# Altium PCB PCB1.PcbDoc
Units mil, origin at the board's own origin, x right, y up, seen from the top; angles counter-clockwise.
Board outline 2637.8 x 3852.11 mil, 4 copper layers (Top Layer, +3.3, +5, Bottom Layer), stack 30.634 mil thick; 56 components, 46 nets, 210 pads, 26 vias.
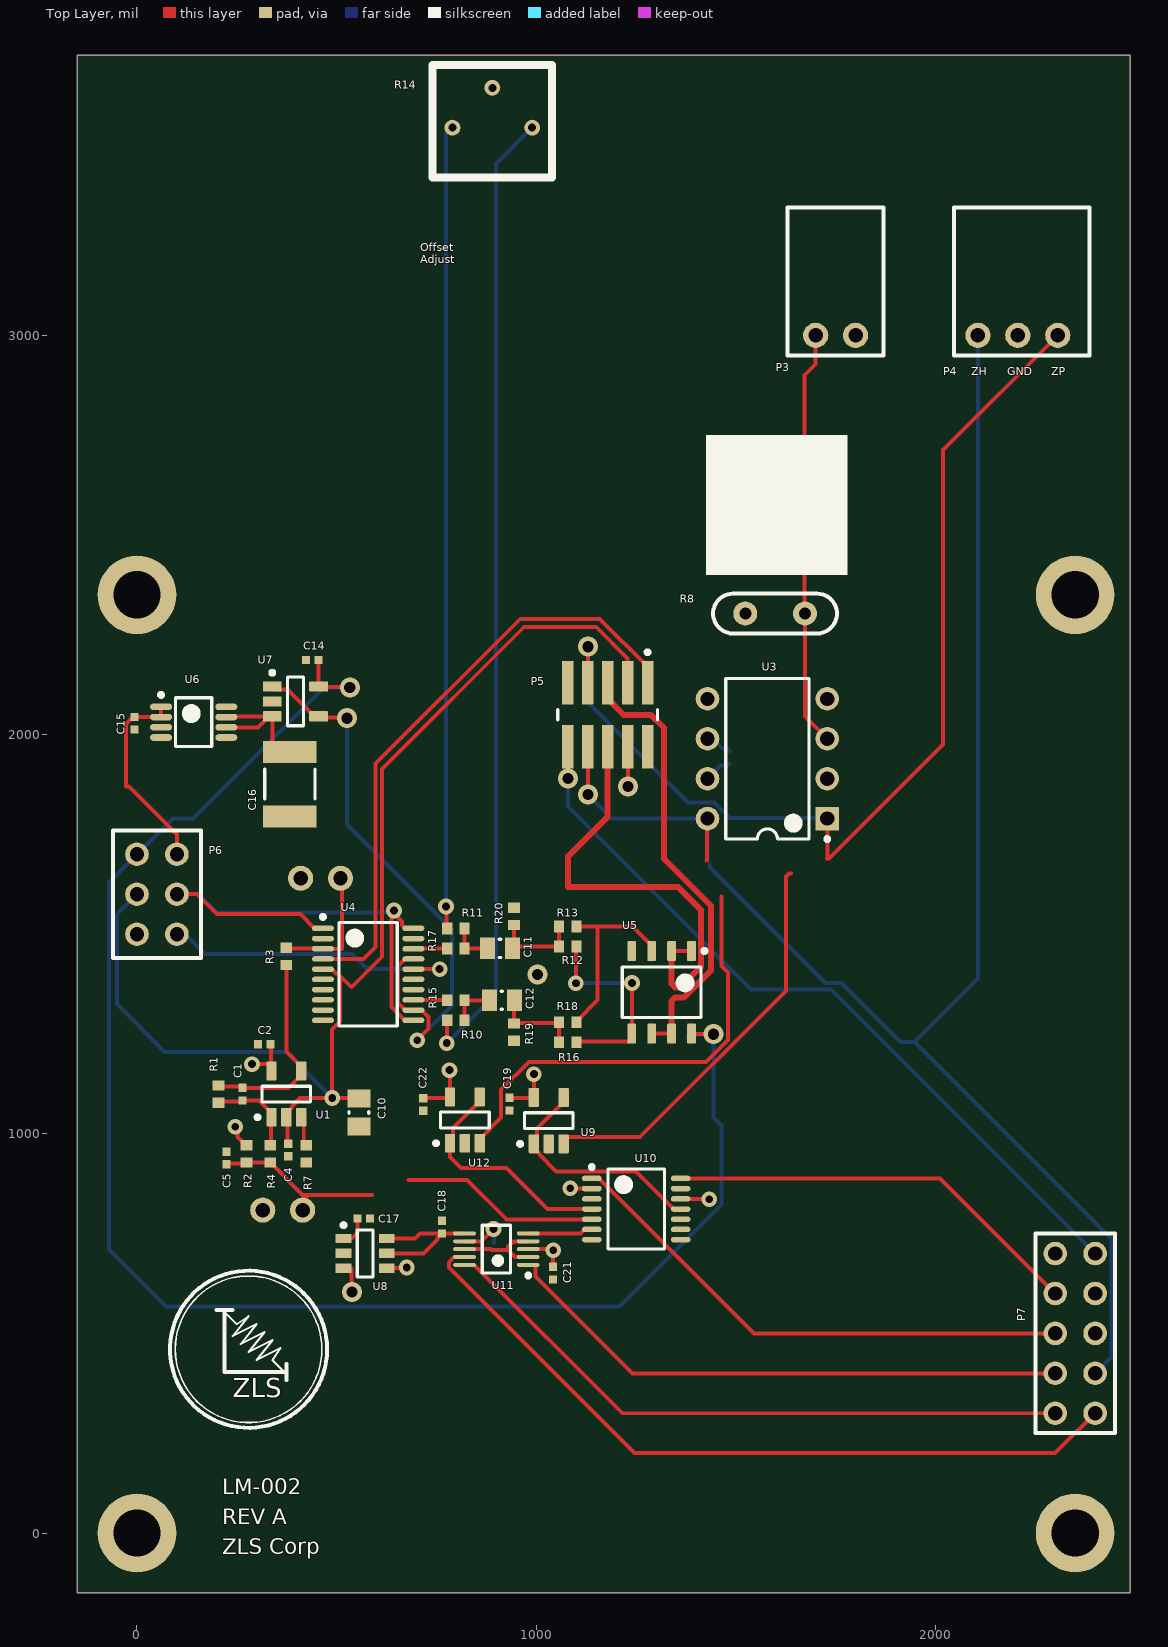
[diagram p0: Top Layer view]
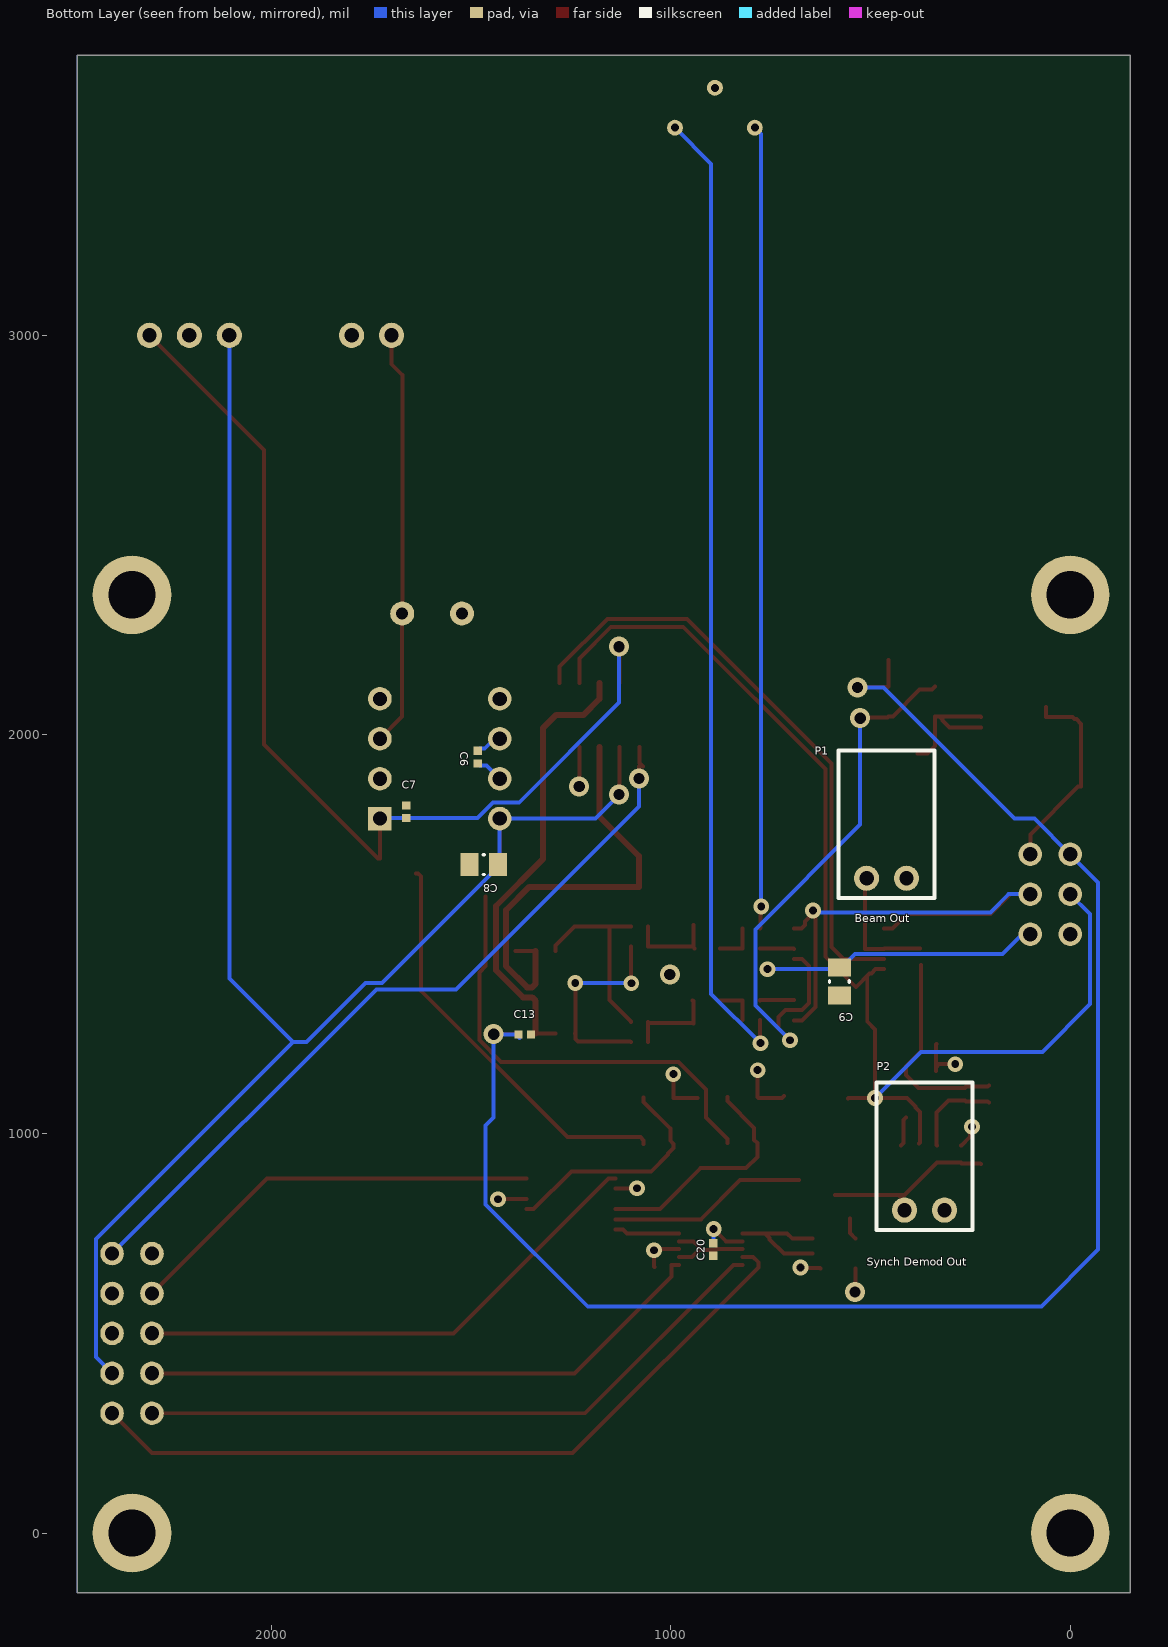
[diagram p1: Bottom Layer view, seen from below]
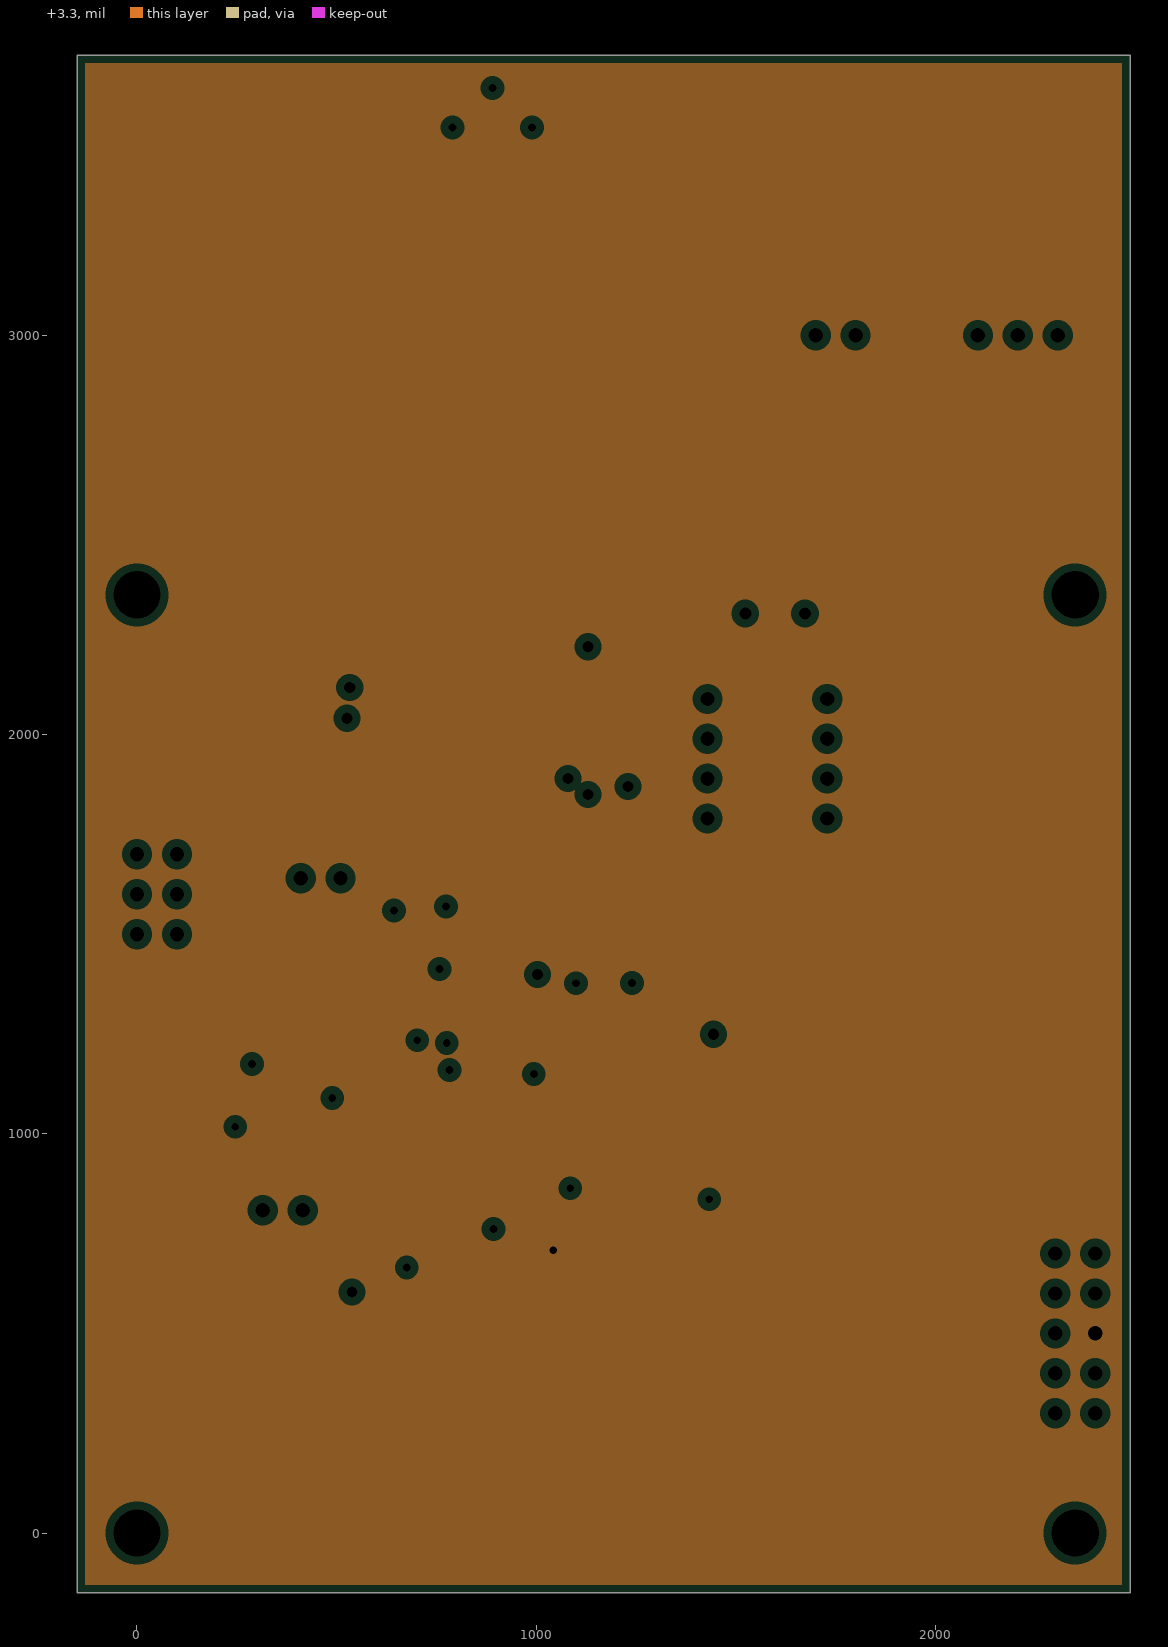
[diagram p2: +3.3, clearances drawn from the general rule]
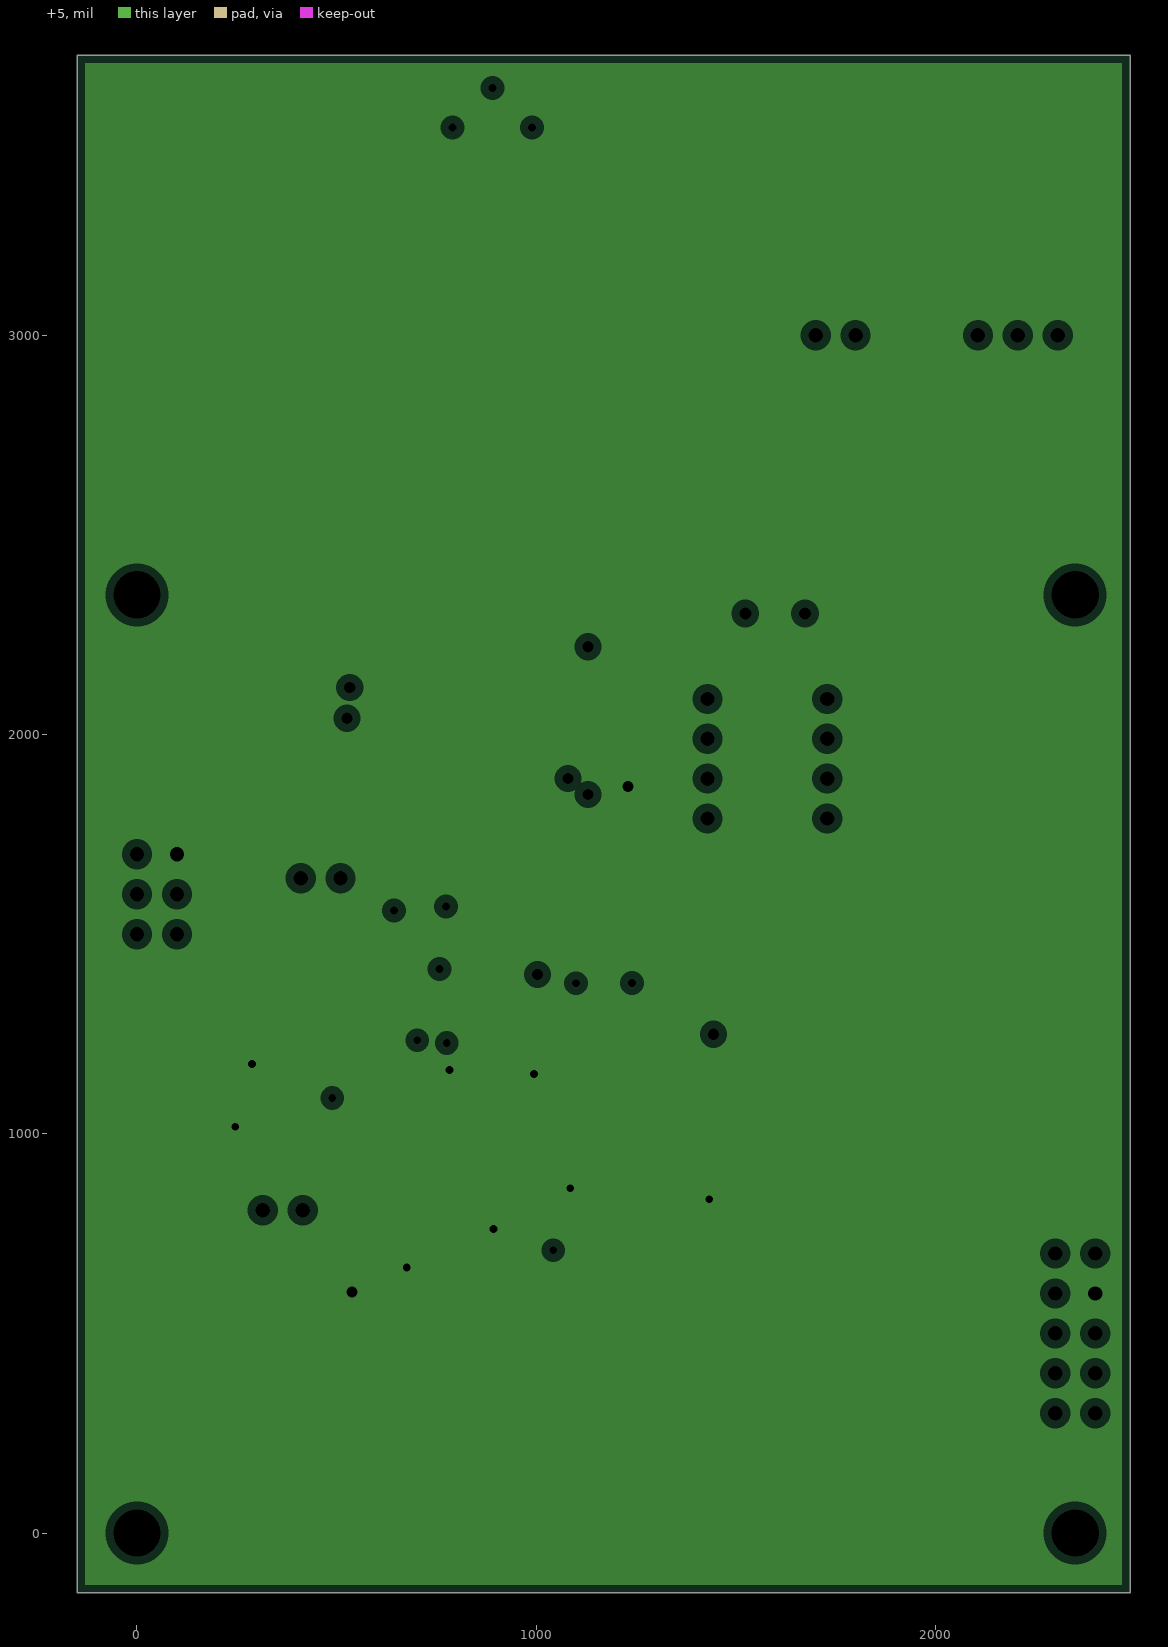
[diagram p3: +5, clearances drawn from the general rule]

## Layer stack, top to bottom
Top Solder: solder mask 0.4, Solder Resist, Dk 3.5
Top Layer: signal copper 1.4
Dielectric 1: core 10, FR-4, Dk 4.2
+3.3: plane copper 1.417, net +3.3
Dielectric 3: prepreg 5, Dk 4.2
+5: plane copper 1.417, net +5
Dielectric 2: core 10, Dk 4.2
Bottom Layer: signal copper 1.4
Bottom Solder: solder mask 0.4, Solder Resist, Dk 3.5

## Board outline
-150.11,-150.11 2487.69,-150.11 2487.68,3702 -150.11,3702

## Design rules (kind name [scope] priority, off if disabled: settings)
Clearance [All] p1: gap=5.91 ignorepadtopadclearanceinfootprint=TRUE except(1.57: SMDPad-SMDPad; 3.94: SMDPad-THPad)
DiffPairsRouting DiffPair_DiffPairsRouting [InDifferentialPair ('PLATE')] p1: maxlimit=10 minlimit=10 mostfreqgap=10 toplayer_minwidth=15 toplayer_maxwidth=15 toplayer_prefwidth=15 bottomlayer_minwidth=15 bottomlayer_maxwidth=15 bottomlayer_prefwidth=15 maxuncoupledlength=500
DiffPairsRouting [All] p2: maxlimit=10 minlimit=10 mostfreqgap=10 toplayer_minwidth=15 toplayer_maxwidth=15 toplayer_prefwidth=15 bottomlayer_minwidth=15 bottomlayer_maxwidth=15 bottomlayer_prefwidth=15 maxuncoupledlength=500
HoleSize [All] p1: absolutevalues=TRUE maxlimit=393.7 minlimit=2.99 maxpercent=80.000 minpercent=20.000
HoleToHoleClearance [All] p1: gap=4.72 allowstackedmicrovias=TRUE
MatchedLengths DiffPair_MatchedLengths [InDifferentialPair ('PLATE')] p1: tolerance=100 checknetsindiffpair=FALSE checkdiffpairvsdiffpair=TRUE checkxsignals=TRUE checkothers=TRUE
MinimumSolderMaskSliver [All] p1: minsoldermaskwidth=0.98
PlaneClearance [All] p1: clearance=20
PlaneConnect [All] p1: planeconnectstyle=Relief reliefexpansion=20 reliefentries=4 reliefconductorwidth=10 reliefairgap=10
PolygonConnect [All] p1: connectstyle=Relief reliefconductorwidth=10 reliefentries=4 polygonreliefangle="90 Angle" airgapwidth=10
RoutingVias [All] p1: holewidth=28 width=50 viastyle="Through Hole" minholewidth=5 minwidth=35.43 maxholewidth=55.12 maxwidth=100
SilkToSilkClearance [All] p1: silktosilkclearance=4.72
SilkToSolderMaskClearance [IsPad] p1: minsilkscreentomaskgap=4.72 clearancetoexposedcopper=TRUE
SolderMaskExpansion [All] p1: expansion=4
Width [All] p1: maxlimit=10 minlimit=3.94 preferedwidth=10
22 further rules are at their usual default settings.

## Classes and differential pairs
component class Sheet2: C18 C19 C20 C21 C22 R23 U7 U10 U11 U12
component class Sheet1: 19.685mil C1 C2 C5 C6 C7 C8 C9 C10 C11 C12 C13 C14 C15 C16 C17 P1 P2 P3 P4 P5 P6 P7 R1 R2 R3 R4 R10 R11 R13 R14 R15 R16 R17 R18 R19 R20 U1 U4 U5 U6 U8 U11
differential pair PLATE: +PLATE_P -PLATE_N

## Components (designator, comment, footprint, x,y, rotation, side; value= is the part's Value field where it differs from the comment)
C1 "" CAPC0402(1005)60_L 264.02,1099.46 r270 top
C2 "0.1uF" CAPC0402(1005)60_L 319.02,1224.46 r180 top
C4 "0.1uF" CAPC0402(1005)60_L 379.02,959.46 r270 top (schematic designator C3)
C5 "" CAPC0402(1005)60_L 224.02,939.46 r270 top (schematic designator C4)
C6 "0.1uF" CAPC0402(1005)60_L 1484.02,1943.46 r90 bottom (schematic designator C5)
C7 "0.1uF" CAPC0402(1005)60_L 1663.02,1806.46 r270 bottom (schematic designator C6)
C8 "Multilayer Ceramic Capacitors MLCC - SMD/SMT 0.01uF 50volts 10% X7R" CAPC0805(2012)145_N 1469.02,1674.46 r0 bottom (schematic designator C7)
C9 "CAP CER 0.1UF 25V X7R 0805" CAPC0805(2012)145_N 578.02,1381.46 r90 bottom (schematic designator C8)
C10 "CAP CER 0.1UF 25V X7R 0805" CAPC0805(2012)145_N 556.02,1053.46 r270 top (schematic designator C9)
C11 "CAP CER 1UF 25V X7R 0805" CAPC0805(2012)155_L 909.02,1464.46 r180 top (schematic designator C10)
C12 "CAP CER 1UF 25V X7R 0805" CAPC0805(2012)155_L 914.02,1334.46 r180 top (schematic designator C11)
C13 "0.1uF" CAPC0402(1005)60_L 1366.02,1248.46 r0 bottom (schematic designator C12)
C14 "0.1uF" CAPC0402(1005)60_L 439,2187 r0 top (schematic designator C13)
C15 "0.1uF" CAPC0402(1005)60_L -6,2028 r90 top (schematic designator C14)
C16 "CAP FILM 10UF 20% 16VDC 1812" CAPC1812(4532)250_N 383,1876 r90 top value=10uF (schematic designator C15)
C17 "0.1uF" CAPC0402(1005)60_L 567.84,787.69 r0 top (schematic designator C16)
C18 "0.1uF" CAPC0402(1005)60_L 764.26,766.23 r270 top (schematic designator C17)
C19 "0.1uF" CAPC0402(1005)60_L 933.02,1074.46 r90 top (schematic designator C18)
C20 "0.1uF" CAPC0402(1005)60_L 894.18,710.13 r270 bottom (schematic designator C19)
C21 "0.1uF" CAPC0402(1005)60_L 1041.82,651.07 r270 top (schematic designator C20)
C22 "0.1uF" CAPC0402(1005)60_L 717.02,1073.46 r90 top (schematic designator C21)
P1 "SSW-102-02-G-S-RA" SSW-102-02-G-S-RA 410,1640 r0 bottom
P2 "SSW-102-02-G-S-RA" SSW-102-02-G-S-RA 315,808.8 r0 bottom
P3 "SSW-102-02-G-S-RA" SSW-102-02-G-S-RA 1800,3000 r180 top
P4 "SSW-103-02-G-S-RA" SSW-103-02-G-S-RA 2106.3,3000 r0 top
P5 "FTSH-105-01-F-DV-K" SMTC-FTSH-105-01-L-DV-K_V 1179.02,2049.46 r180 top
P6 "MTLW-103-08-G-D-004" MTLW-103-08-G-D-004 50,1600 r270 top
P7 "TLW-105-05-G-D" TLW-105-05-G-D 2300,700 r270 top
R1 "300K" RESC0402(1005)_M 204.02,1099.46 r270 top
R2 "" RESC0402(1005)_M 274.02,949.46 r90 top
R3 "18K2 1% 0402(1005)" RESC0402(1005)_M 374.02,1444.46 r270 top
R4 "511k" RESC0402(1005)_M 334.02,949.46 r270 top
R7 "33K" RESC0402(1005)_M 424.02,949.46 r90 top (schematic designator R5)
R8 "TBD" VH102K 1673.23,2303.15 r180 top (schematic designator R6)
R10 "3.9k" RESC0402(1005)_M 799.02,1464.46 r180 top (schematic designator R7)
R11 "7.5k" RESC0402(1005)_M 799.02,1514.46 r0 top (schematic designator R8)
R12 "0" RESC0402(1005)_M 1079.02,1469.46 r180 top (schematic designator R9)
R13 "DNP" RESC0402(1005)_M 1079.02,1519.46 r180 top (schematic designator R10)
R14 "TRIMMER 5K OHM 0.25W PC PIN" "TRIMMER 2.54" 790,3520 r0 top (schematic designator R11)
R15 "7.5k" RESC0402(1005)_M 799.02,1284.46 r180 top (schematic designator R12)
R16 "DNP" RESC0402(1005)_M 1079.02,1229.46 r180 top (schematic designator R13)
R17 "3.9k" RESC0402(1005)_M 799.02,1334.46 r0 top (schematic designator R14)
R18 "0" RESC0402(1005)_M 1079.02,1279.46 r180 top (schematic designator R15)
R19 "1M" RESC0402(1005)_M 944.02,1254.46 r90 top (schematic designator R16)
R20 "1M" RESC0402(1005)_M 944.02,1544.46 r270 top (schematic designator R17)
U1 "OPA188AIDBVR" DBV0005A_M 374.02,1099.46 r90 top
U3 "AD584KNZ" ADI-N-8 1579.02,1939.46 r180 top (schematic designator U2)
U4 "MAX333CWP+" TSOP65P640X90-20N 579.02,1399.46 r0 top (schematic designator U3)
U5 "OPA2188AIDR" D0008A_L 1314.02,1354.46 r270 top (schematic designator U4)
U6 "LTC6655BHMS8-5#PBF" TSOP65P490X110-8N 142,2031 r0 top (schematic designator U5)
U7 "OPA188AIDBVR" DBV0005A_M 397,2083 r0 top (schematic designator U6)
U8 "MAX6070AAUT41+T" SOT95P280X445-6N 571.35,700.28 r0 top (schematic designator U7)
U9 "OPA188AIDBVR" DBV0005A_M 1031.43,1032.89 r90 top (schematic designator U8)
U10 "ADG1204YRUZ-REEL7" ADI-RU-14_L 1250.48,811.5 r0 top (schematic designator U9)
U11 "MAX11100EUB+T" U10+2_L 900.2,711.03 r180 top (schematic designator U10)
U12 "OPA188AIDBVR" DBV0005A_M 821.25,1034.46 r90 top (schematic designator U11)

## Footprints (in the part's own frame and the unit in brackets; to place one, negate y for a bottom-side part, rotate by r counter-clockwise, add the part's x,y. Pads: shape width x height; smd on the part's side, far side on the other; paste and mask are expansions set on the pad)
ADI-N-8 [mm] "DIP, 8-Leads, Body 9.59x6.6mm, Pitch 2.54mm"
  rect 1.5x1.5 hole 0.9: 1(-3.81,3.81)
  round 1.5 hole 0.9: 2(-3.81,1.27) 3(-3.81,-1.27) 4(-3.81,-3.81) 5(3.81,-3.81) 6(3.81,-1.27) 7(3.81,1.27) 8(3.81,3.81)
  silkscreen extent -3.94,-5.1 2.65,5.23, body extent -3.95,-5.07 3.95,5.07, height 5.33
ADI-RU-14_L [mm] "SOP, 14-Leads, Body 5x4.4mm, Pitch 0.65mm, IPC High Density"
  oval 1.25x0.35 smd: 1(-2.825,1.95) 2(-2.825,1.3) 3(-2.825,0.65) 4(-2.825,0) 5(-2.825,-0.65) 6(-2.825,-1.3) 7(-2.825,-1.95) 8(2.825,-1.95) 9(2.825,-1.3) 10(2.825,-0.65) 11(2.825,0) 12(2.825,0.65) 13(2.825,1.3) 14(2.825,1.95)
  silkscreen extent -2.95,-2.55 1.8,2.8, body extent -2.25,-2.55 2.25,2.55, height 1.2
CAPC0402(1005)60_L [mm] "Chip Capacitor, Body 1.0x0.5mm, Height 0.6mm, IPC High Density"
  rect 0.52x0.52 smd: 1(-0.4,0) 2(0.4,0)
  body extent -0.55,-0.3 0.55,0.3, height 0.6
CAPC0805(2012)145_N [mm] "Chip Capacitor, Body 2.0x1.2mm, Height 1.45mm, IPC Medium Density"
  rect 1.15x1.45 smd: 1(-0.9,0) 2(0.9,0)
  silkscreen extent -0.05,-0.62 0.05,0.63, body extent -1.1,-0.72 1.1,0.73, height 1.45
CAPC0805(2012)155_L [mm] "Chip Capacitor, Body 2.0x1.2mm, Height 1.55mm, IPC High Density"
  rect 0.95x1.35 smd: 1(-0.8,0) 2(0.8,0)
  silkscreen extent -0.05,-0.58 0.05,0.58, body extent -1.1,-0.72 1.1,0.72, height 1.55
CAPC1812(4532)250_N [mm] "Chip Capacitor, Body 4.5x3.2mm, Height 2.5mm, IPC Medium Density"
  rect 1.4x3.4 smd: 1(-2.05,0) 2(2.05,0)
  silkscreen extent -0.95,-1.6 0.95,1.6, body extent -2.4,-1.7 2.4,1.7, height 2.5
D0008A_L [mm] "SOIC, 8-Leads, Body 5x4mm, Pitch 1.27mm, IPC High Density"
  rrect18% 1.25x0.55 smd: 1(-2.625,1.905) 2(-2.625,0.635) 3(-2.625,-0.635) 4(-2.625,-1.905) 5(2.625,-1.905) 6(2.625,-0.635) 7(2.625,0.635) 8(2.625,1.905)
  silkscreen extent -2.75,-2.5 1.6,2.86, body extent -3,-2.45 3,2.45, height 1.63
DBV0005A_M [mm] "SOT23, 5-Leads, Body 3.05x1.75mm, Pitch 0.95mm, IPC Low Density"
  rrect15% 1.2x0.65 smd: 1(-1.475,0.95) 2(-1.475,0) 3(-1.475,-0.95) 4(1.475,-0.95) 5(1.475,0.95)
  silkscreen extent -1.6,-1.55 0.5,1.95, body extent -1.42,-1.46 1.42,1.46, height 1.08
MTLW-103-08-G-D-004 [mm]
  round 1.5 hole 0.91: 1(-2.54,-1.27) 2(-2.54,1.27) 3(0,-1.27) 4(0,1.27) 5(2.54,-1.27) 6(2.54,1.27)
  silkscreen extent -4.06,-2.79 4.06,2.79, body extent -3.81,-2.51 3.81,2.51, height 12.2
RESC0402(1005)_M [mm] "Chip Resistor, Body 1.0x0.5mm, IPC Low Density"
  rect 0.65x0.75 smd: 1(-0.55,0) 2(0.55,0)
  body extent -0.52,-0.28 0.53,0.28, height 0.4
SMTC-FTSH-105-01-L-DV-K_V [mm] "CONN, 10-Leads, Body 6.35x3.43mm, Pitch 1.27mm"
  rect 0.74x2.79 smd: 1(-2.54,-2.035) 2(-2.54,2.035) 3(-1.27,-2.035) 4(-1.27,2.035) 5(0,-2.035) 6(0,2.035) 7(1.27,-2.035) 8(1.27,2.035) 9(2.54,-2.035) 10(2.54,2.035)
  silkscreen extent -3.17,-4.1 3.17,0.34, body extent -3.17,-2.92 3.18,2.92, height 6.12
SOT95P280X445-6N [mm] "SOT23, 6-Leads, Body 2.90x2.80mm, Pitch 0.95mm, IPC Medium Density"
  rect 1x0.6 smd: 1(-1.375,0.95) 2(-1.375,0) 3(-1.375,-0.95) 4(1.375,-0.95) 5(1.375,0) 6(1.375,0.95)
  silkscreen extent -1.5,-1.5 0.5,1.92, body extent -1.5,-1.5 1.5,1.5, height 4.45
SSW-102-02-G-S-RA [mm]
  round 1.6 hole 0.91: 1(0,0) 2(2.54,0)
  silkscreen extent -1.78,-8.13 4.32,1.27, body extent -1.52,-8.06 4.06,0.44, height 3.21
SSW-103-02-G-S-RA [mm]
  round 1.6 hole 0.91: 1(0,0) 2(2.54,0) 3(5.08,0)
  silkscreen extent -1.52,-1.27 7.11,8.13, body extent -1.27,-0.44 6.86,8.06, height 1.73
TLW-105-05-G-D [mm]
  round 1.5 hole 0.91: 1(0,0) 2(0,2.54) 3(2.54,0) 4(2.54,2.54) 5(5.08,0) 6(5.08,2.54) 7(7.62,0) 8(7.62,2.54) 9(10.16,0) 10(10.16,2.54)
  silkscreen extent -1.27,-1.27 11.43,3.81, body extent -1.27,-1.31 11.43,3.72, height 6.35
"TRIMMER 2.54" [mil]
  round 40 hole 20: 1(0,0) 2(100,100) 3(200,0)
  silkscreen extent -50,-125 250,158, body extent -60,-126 260,200, height 175
TSOP65P490X110-8N [mm] "TSOP, 8-Leads, Body 3.00x3.00mm, Pitch 0.65mm, IPC Medium Density"
  oval 1.4x0.42 smd: 1(-2.075,0.975) 2(-2.075,0.325) 3(-2.075,-0.325) 4(-2.075,-0.975) 5(2.075,-0.975) 6(2.075,-0.325) 7(2.075,0.325) 8(2.075,0.975)
  silkscreen extent -2.2,-1.55 1.15,1.86, body extent -2.46,-1.55 2.46,1.55, height 1.1
TSOP65P640X90-20N [mm] "TSOP, 20-Leads, Body 6.50x4.40mm, Pitch 0.65mm, IPC Medium Density"
  oval 1.4x0.35 smd: 1(-2.875,2.925) 2(-2.875,2.275) 3(-2.875,1.625) 4(-2.875,0.975) 5(-2.875,0.325) 6(-2.875,-0.325) 7(-2.875,-0.975) 8(-2.875,-1.625) 9(-2.875,-2.275) 10(-2.875,-2.925) 11(2.875,-2.925) 12(2.875,-2.275) 13(2.875,-1.625) 14(2.875,-0.975) 15(2.875,-0.325) 16(2.875,0.325) 17(2.875,0.975) 18(2.875,1.625) 19(2.875,2.275) 20(2.875,2.925)
  silkscreen extent -3,-3.3 1.85,3.77, body extent -2.25,-3.3 2.25,3.3, height 0.9
U10+2_L [mm] "TSSOP, 10-Leads, Body 3x3mm, Pitch 0.5mm, IPC High Density"
  oval 1.45x0.25 smd: 1(-2.025,1) 2(-2.025,0.5) 3(-2.025,0) 4(-2.025,-0.5) 5(-2.025,-1) 6(2.025,-1) 7(2.025,-0.5) 8(2.025,0) 9(2.025,0.5) 10(2.025,1)
  silkscreen extent -2.15,-1.52 0.9,1.8, body extent -1.55,-1.55 1.55,1.55, height 1.1
VH102K [mil] "Hermetically Sealed High Precision Resistor"
  round 60 hole 30: 1(0,0) 2(149.61,0)
  silkscreen extent -80,-50 230,50

## Part data
C1: library part CMP-1034-01343-1, Capacitance=470nF, Case/Package=0402, Case Code (Metric)=1005, Dielectric=X5R, Dielectric Material=Ceramic, Manufacturer=TDK, Manufacturer Part Number=C1005X5R1E474M050BB, Max Operating Temperature=85°C, Min Operating Temperature=-55°C, Package Quantity=10000, Supplier Part Number 1=810-C1005X5R1E474M, Tolerance=20%, Voltage Rating=25V, Case Code (Imperial)=0402, ComponentLink1Description=https://datasheet.ciiva.com/26870/getdatasheetpartid-753870-26870164.pdf, ComponentLink1URL=https://datasheet.ciiva.com/26870/getdatasheetpartid-753870-26870164.pdf, ComponentLink2Description=https://datasheet.ciiva.com/24219/mlcc-commercial-general-en-24219290.pdf, ComponentLink2URL=https://datasheet.ciiva.com/24219/mlcc-commercial-general-en-24219290.pdf, Composition=Ceramic, Depth=0.5mm, Height=0.5mm, Lead Free="Lead Free", Length=1mm, Mount="Surface Mount", Packaging="Tape and Reel", Pricing 1="1=0.15, 10=0.101, 50=0.101, 100=0.04, 1000=0.028, 10000=0.023 (USD)", Radiation Hardening=No, REACH SVHC="No SVHC", Stock 1=40105, Supplier 1=Mouser, Termination=SMD/SMT, Thickness=500um, Voltage Rating (DC)=25V, Weight=2.3E-05oz, Width=0.02inch
C2 C4 C6 C7 C13 C14 C15 C17 C18 C19 C20 C21 C22: library part CMP-1034-00252-1, "CAP CER 0.1UF 10V X7R 0402", Manufacturer="Murata Electronics North America", Manufacturer Part Number=GRM155R71A104KA01D, Operating Temperature="-55°C ~ 125°C", Package / Case="0402 (1005 Metric)", Ratings=-, Supplier Part Number 1=490-6321-1-ND, Temperature Coefficient=X7R, Tolerance=±10%, Voltage - Rated=10V, Applications="General Purpose", Category=Capacitors, ComponentLink1Description=http://www.murata.com/~/media/webrenewal/support/library/catalog/products/capacitor/mlcc/c02e.ashx?la=en-us, ComponentLink1URL=http://www.murata.com/~/media/webrenewal/support/library/catalog/products/capacitor/mlcc/c02e.ashx?la=en-us, Features=-, Height - Seated (Max)=-, Lead Spacing=-, Mounting Type="Surface Mount, MLCC", Packaging="Cut Tape (CT)", Part Status=Active, Pricing 1="1=0.1, 10=0.014, 100=0.0063, 500=0.00446, 1000=0.00351, 2500=0.00319, 5000=0.00293 (USD)", RoHS="RoHS Compliant", Size / Dimension="0.039\" L x 0.020\" W (1.00mm x 0.50mm)", Stock 1=2920395, Supplier 1=Digi-Key, Thickness (Max)="0.022\" (0.55mm)"
C5: library part CMP-1034-01343-1, Capacitance=22, Capacitance Tolerance=5%, Ceramic Capacitor Case="0402 [1005 Metric]", Dielectric Characteristic="C0G / NP0", Manufacturer=AVX, Manufacturer Part Number=04025A220JAT2A, Supplier Part Number 1=96M1143, Voltage Rating=50, ComponentLink1Description=http://www.farnell.com/datasheets/2068140.pdf, ComponentLink1URL=http://www.farnell.com/datasheets/2068140.pdf, Packaging="Cut Tape", Pricing 1="1=0.003, 25=0.003, 100=0.003, 250=0.003, 500=0.003, 1000=0.003, 2500=0.003 (USD)", Product Range=-, RoHS=YES, Stock 1=239391, Supplier 1=Newark
C8: library part CMP-1036-04795-1, Capacitance=10nF, Case/Package=0805, Case Code (Metric)=2012, Dielectric=X7R, Dielectric Material=Ceramic, Manufacturer=Kemet, Manufacturer Part Number=C0805C103K5RACAUTO, Max Operating Temperature=125°C, Min Operating Temperature=-55°C, Package Quantity=1, Supplier Part Number 1=399-6924-1-ND, Tolerance=10%, Voltage Rating=50V, Case Code (Imperial)=0805, ComponentLink1Description=https://datasheet.ciiva.com/22700/1693454-22700519.pdf, ComponentLink1URL=https://datasheet.ciiva.com/22700/1693454-22700519.pdf, ComponentLink2Description=https://datasheet.ciiva.com/7842/1693454-7842175.pdf, ComponentLink2URL=https://datasheet.ciiva.com/7842/1693454-7842175.pdf, Contact Plating=Tin, Depth=1.25mm, Height=0.78mm, Length=2mm, Mount="Surface Mount", Packaging="Tape and Reel", Pricing 1="1=0.12, 10=0.087, 100=0.041, 500=0.0287, 1000=0.0238 (USD)", Radiation Hardening=No, REACH SVHC="No SVHC", Stock 1=63236, Supplier 1=Digi-Key, Termination=SMD/SMT, Thickness=0.035inch, Voltage Rating (DC)=50V, Width=0.049inch
C9 C10: library part CMP-1036-04795-1, Capacitance=0.1µF, Manufacturer="Murata Electronics North America", Manufacturer Part Number=GRM21BR71E104KA01L, Operating Temperature="-55°C ~ 125°C", Package / Case="0805 (2012 Metric)", Ratings=-, Supplier Part Number 1=490-1673-6-ND, Temperature Coefficient=X7R, Tolerance=±10%, Voltage - Rated=25V, Applications="General Purpose", Category=Capacitors, ComponentLink1Description=http://www.murata.com/~/media/webrenewal/support/library/catalog/products/capacitor/mlcc/c02e.ashx, ComponentLink1URL=http://www.murata.com/~/media/webrenewal/support/library/catalog/products/capacitor/mlcc/c02e.ashx, Features=-, Height - Seated (Max)=-, Lead Spacing=-, Lead Style=-, Mounting Type="Surface Mount, MLCC", Packaging=Digi-Reel®, Part Status=Active, Pricing 1="1=0.2, 10=0.145, 100=0.0683, 500=0.04788, 1000=0.03964 (USD)", RoHS="RoHS Compliant", Size / Dimension="0.079\" L x 0.049\" W (2.00mm x 1.25mm)", Stock 1=891652, Supplier 1=Digi-Key, Thickness (Max)="0.053\" (1.35mm)"
C11 C12: library part CMP-1036-04882-1, Capacitance=1µF, Manufacturer="Murata Electronics North America", Manufacturer Part Number=GRM21BR71E105KA99L, Operating Temperature="-55°C ~ 125°C", Package / Case="0805 (2012 Metric)", Ratings=-, Supplier Part Number 1=490-6484-6-ND, Temperature Coefficient=X7R, Tolerance=±10%, Voltage - Rated=25V, Applications="General Purpose", Category=Capacitors, ComponentLink1Description=http://www.murata.com/~/media/webrenewal/support/library/catalog/products/capacitor/mlcc/c02e.ashx, ComponentLink1URL=http://www.murata.com/~/media/webrenewal/support/library/catalog/products/capacitor/mlcc/c02e.ashx, Features=-, Height - Seated (Max)=-, Lead Spacing=-, Lead Style=-, Mounting Type="Surface Mount, MLCC", Packaging=Digi-Reel®, Part Status=Active, Pricing 1="1=0.14, 10=0.099, 100=0.0468, 500=0.0328, 1000=0.02715 (USD)", RoHS="RoHS Compliant", Size / Dimension="0.079\" L x 0.049\" W (2.00mm x 1.25mm)", Stock 1=295074, Supplier 1=Digi-Key, Thickness (Max)="0.053\" (1.35mm)"
C16: library part CMP-1040-01653-1, Case-EIA=1812, Case-Metric=4532, Dielectric Material="Acrylic, Metallized", Manufacturer=Rubycon, Manufacturer Part Number=16ST106MC44532, Operating Temperature="-55°C ~ 125°C", Package / Case="1812 (4532 Metric)", Rated Voltage="16 V", Supplier Part Number 1=1189-1792-1-ND, Tolerance=±10%, Voltage Rating - AC=-, Voltage Rating - DC=16V, Applications="DC Link, DC Filtering", Category=Capacitors, ComponentLink1Description=http://www.rubycon.co.jp/en/catalog/e_pdfs/pmlcap/e_ST.pdf, ComponentLink1URL=http://www.rubycon.co.jp/en/catalog/e_pdfs/pmlcap/e_ST.pdf, Features=-, Height - Seated (Max)="0.102\" (2.60mm)", Lead Spacing=-, Max Thickness="2.5 mm", Mounting Type="Surface Mount", Packaging="Cut Tape (CT)", Part Status=Active, Pricing 1="1=7.05, 10=6.263, 100=5.0105 (USD)", RoHS="RoHS Compliant", Size / Dimension="0.177\" L x 0.126\" W (4.50mm x 3.20mm)", Stock 1=1994, Supplier 1=Digi-Key, Technology=SMT
P1 P2 P3: Supplier Part Number 1=SAM1225-02-ND, Supplier 1=Digi-Key
P5: library part CMP-2000-05352-1, "Male Header, Pitch 1.27 mm, 2 x 5 Position, Height 6.12 mm, RoHS, Tube", Color=Black, Manufacturer=Samtec, Package Description="Male Header, Pitch 1.27 mm, 2 x 5 Position, Height 5.97 mm, Tail Length 4.32 mm", Package Reference=FTSH-105-01-L-DV-K, Category=Connectors,Interconnects, Connector Type=Header,Shrouded, Contact Finish=Gold, Contact Finish Thickness=3µin(0.08µm), Contact Type=MalePin, Datasheet URL=http://suddendocs.samtec.com/prints/ftsh-1xx-xx-xxx-dv-xxx-mkt.pdf, Datasheet Version="Rev. ET, 10/1995", Family=RectangularConnectors-Headers,MalePins, Fastening Type=-, Features=-, Manufacturer URL=http://www.samtec.com/, Mounting Type=SurfaceMount, Number of Positions=10, Number of Positions Loaded=All, Number of Rows=2, Package URL=http://suddendocs.samtec.com/prints/ftsh-1xx-xx-xxx-dv-xxx-footprint.pdf, Packaging=Tube, Series=FTSH, Termination=Solder
P6: library part "Header 3X2", "Header, 3-Pin, Dual row"
P7: Current Rating="5.2A per Contact", Insulation Color=Black, Manufacturer="Samtec Inc.", Manufacturer Part Number=MTLW-105-05-G-D-170, Material Flammability Rating="UL94 V-0", Operating Temperature="-55°C ~ 125°C", Supplier Part Number 1=MTLW-105-05-G-D-170-ND, Voltage Rating=-, Applications=-, Category="Connectors, Interconnects", ComponentLink1Description=http://suddendocs.samtec.com/prints/mtlw-1xx-xx-xx-x-xxx-xx-xx-mkt1.pdf, ComponentLink1URL=http://suddendocs.samtec.com/prints/mtlw-1xx-xx-xx-x-xxx-xx-xx-mkt1.pdf, Connector Type=Header, Contact Finish - Mating=Gold, Contact Finish - Post=Gold, Contact Finish Thickness - Mating="10µin (0.25µm)", Contact Finish Thickness - Post="3µin (0.08µm)", Contact Length - Mating="0.170\" (4.32mm)", Contact Length - Post="0.105\" (2.67mm)", Contact Material="Phosphor Bronze", Contact Shape=Square, Contact Type="Male Pin", Fastening Type=Push-Pull, Features=-, Ingress Protection=-, Insulation Height="0.060\" (1.52mm)", Insulation Material="Liquid Crystal Polymer (LCP)", Mated Stacking Heights=-, Mounting Type="Through Hole", Number of Positions=10, Number of Positions Loaded=All, Number of Rows=2, Overall Contact Length="0.335\" (8.51mm)", Packaging=Tube, Part Status=Active, Pitch - Mating="0.100\" (2.54mm)", Pricing 1="1=1.79 (USD)", RoHS="RoHS Compliant", Row Spacing - Mating="0.100\" (2.54mm)", Shrouding=Unshrouded, Stock 1=0, Style="Board to Board or Cable", Supplier 1=Digi-Key, Termination=Solder
R1 R4 R7 R12 R13 R16 R18: library part CMP-1011-00651-1
R2: library part CMP-1011-00651-1, "RES SMD 100K OHM 1% 1/8W 0402", Manufacturer=VISHAY, Manufacturer Part Number=CRCW0402100KFKEDHP, Supplier Part Number 1=24T2824, ComponentLink1Description=http://www.farnell.com/datasheets/2140397.pdf, ComponentLink1URL=http://www.farnell.com/datasheets/2140397.pdf, Pricing 1="10000=0.014, 20000=0.012 (USD)", Stock 1=0, Supplier 1=Newark
R3: library part CMP-1011-00651-1, "18K2 0.063W 1% 0402 (1005 Metric)  SMD", Manufacturer=VISHAY, Manufacturer Part Number=CRCW040218K2FKED, Power Rating=63, Resistance=18.2, Resistance Tolerance=1%, Resistor Case Style="0402 [1005 Metric]", Supplier Part Number 1=52K6758, Voltage Rating=50, ComponentLink1Description=http://www.vishay.com/docs/31543/packsmre.pdf, ComponentLink1URL=http://www.vishay.com/docs/31543/packsmre.pdf, ComponentLink2Description=http://www.farnell.com/cad/1551401.zip, ComponentLink2URL=http://www.farnell.com/cad/1551401.zip, ComponentLink3Description=http://www.farnell.com/datasheets/2111203.pdf?_ga=1.39057253.733356815.1493180800, ComponentLink3URL=http://www.farnell.com/datasheets/2111203.pdf?_ga=1.39057253.733356815.1493180800, No. of Pins=2, Packaging="Cut Tape", Pricing 1="1=0.004, 25=0.004, 100=0.004, 250=0.004, 500=0.004, 1000=0.004 (USD)", Product Range="CRCW Series", RoHS=YESX, Stock 1=9263, Supplier 1=Newark
R8: library part CMP-1013-00393-1
R10 R11 R15 R17 R19 R20: library part CMP-1011-00463-1
R14: library part Trimmer, Manufacturer="Vishay Foil Resistors (Division of Vishay Precision Group)", Manufacturer Part Number=Y00535K00000J0L, Power (Watts)="0.25W, 1/4W", Resistance (Ohms)=5k, Resistive Material="Metal Foil", Supplier Part Number 1=804-1020-ND, Temperature Coefficient=±10ppm/°C, Tolerance=±5%, Adjustment Type="Side Adjustment", Category="Potentiometers, Variable Resistors", ComponentLink1Description=http://www.vishaypg.com/docs/63053/1240.pdf, ComponentLink1URL=http://www.vishaypg.com/docs/63053/1240.pdf, Mounting Type="Through Hole", Number of Turns=21, Packaging=Bulk, Part Status=Active, Pricing 1="1=34.42, 10=32.265, 25=26.5292, 50=22.944, 100=22.227, 250=20.793, 500=19.2156 (USD)", RoHS="RoHS Compliant", Size / Dimension="Rectangular - 0.250\" x 0.175\" Face x 0.250\" L (6.35mm x 4.45mm x 6.35mm)", Stock 1=679, Supplier 1=Digi-Key, Termination Style="PC Pins"
U1 U7 U9 U12: library part CMP-0809-00005-2, "Precision, Low Noise, Rail-to-Rail Output, Zero-Drift Operational Amplifier, 4 to 36 V, -40 to 125 degC, 5-pin SOT23 (DBV5), Green (RoHS & no Sb/Br)", Manufacturer="Texas Instruments", Rating=Catalog, Total Supply Voltage(Max)(+5V is 5, +/-5V is 10)=36, Total Supply Voltage(Min)(+5V is 5, +/-5V is 10)=4, CMRR(Min)(dB)=120, Code_JEDEC=MO-178, ComponentLink1Description="Manufacturer URL", ComponentLink1URL=http://www.ti.com/, ComponentLink2Description=Datasheet, ComponentLink2URL=http://www.ti.com/lit/ds/symlink/opa188.pdf, ComponentLink3Description="Package Specification", ComponentLink3URL=http://www.ti.com/litv/pdf/mpds018i, DatasheetVersion=SBOS642A, Eco-Plan="Green (RoHS & no Sb/Br)", GBW(Typ)(MHz)=2, Iq per channel(Max)(mA)=0.51, Mounting Technology="Surface Mount", Number of Channels=1, Offset Drift(Typ)(uV/C)=0.03, PackageDescription="5-Pin Plastic Small Outline, Body 1.6 x 2.9 mm, Pitch 0.95 mm", PackageReference=DBV0005A, PackageVersion="4073253-4/K, 03/2006", PartNumber=OPA188AIDBVR, Slew Rate(Typ)(V/us)=0.8, SubFamily="Zero Drift Precision Amplifier"
U3: library part CMP-0784-00054-1, "Pin Programmable, Precision Voltage Reference, + 2.5 / + 5 / + 7.5 / + 10 Prog V Output, 4.5 to 30 V Supply, Commercial, 8-pin DIP (N-8), Tube", Manufacturer="Analog Devices", Operating Temp Range="0 to 70 degC", Code_JEDEC=MS-001, ComponentLink1Description="Manufacturer URL", ComponentLink1URL=http://www.analog.com/en/index.html, ComponentLink2Description=Datasheet, ComponentLink2URL=http://www.analog.com/static/imported-files/data_sheets/AD584.pdf, ComponentLink3Description="Package Specification", ComponentLink3URL=http:/www.analog.com/static/imported-files/packages/PKG_PDF/PDIP(N)/N_8.pdf, ComponentLink4Description="URL Link1", ComponentLink4URL="Product URL:http://www.analog.com/en/special-linear-functions/voltage-references/ad584/products/product.html", DatasheetVersion="Rev. C", Max V Supply (V)=30, Min V Supply (V)=4.5, Mounting Technology="Through Hole", PackageDescription="8-Pin Plastic Dual In-Line Package, Row spacing 7.62 mm, Pitch 2.54 mm", PackageReference=N-8, PackageVersion="070606-A, 07/2006", Packing=Tube, PartNumber=AD584KNZ, Ref Out TC (ppm/C)=15, Vout="2.5V, 5V, 7.5V, 10V"
U4: "IC SWITCH QUAD SPDT 20TSSOP", Case/Package=TSSOP, Dual Supply Voltage=15V, Manufacturer=Maxim, Manufacturer Part Number=MAX333AEUP+, Max Dual Supply Voltage=20V, Max Operating Temperature=85°C, Max Power Dissipation=559mW, Max Supply Current=250uA, Max Supply Voltage=30V, Min Dual Supply Voltage=4.5V, Min Operating Temperature=-40°C, Min Supply Voltage=10V, On-State Resistance=35R, Operating Supply Current=1uA, Package Quantity=74, Supplier Part Number 1=700-MAX333AEUP, ComponentLink1Description=https://datasheet.ciiva.com/2978/max333a-2978850.pdf, ComponentLink1URL=https://datasheet.ciiva.com/2978/max333a-2978850.pdf, ComponentLink2Description=https://datasheet.ciiva.com/30478/0900766b81253c85-30478260.pdf, ComponentLink2URL=https://datasheet.ciiva.com/30478/0900766b81253c85-30478260.pdf, ComponentLink3Description=https://datasheet.ciiva.com/1674/max333a-1674617.pdf, ComponentLink3URL=https://datasheet.ciiva.com/1674/max333a-1674617.pdf, ComponentLink4Description=https://datasheet.ciiva.com/26825/max333aeup-26825546.pdf, ComponentLink4URL=https://datasheet.ciiva.com/26825/max333aeup-26825546.pdf, Height=0.95mm, Lead Free="Lead Free", Length=6.6mm, Number of Bits=4, Number of Channels=4, Number of Pins=20, Packaging=Rail/Tube, Pricing 1="1=6.77, 10=6.43, 50=5.8, 100=5.8, 1000=5.62, 10000=5.62 (USD)", Radiation Hardening=No, REACH SVHC=Unknown, Stock 1=664, Supplier 1=Mouser, Supply Type=Single,Dual, Throw Configuration=SPDT, Turn-Off Delay Time=145ns, Turn-On Delay Time=175ns, Weight=0.006737oz, Width=4.5mm
U5: library part CMP-0272-00241-3, "0.03 uV/degC, 6 uV Vos, Low Noise, Rail-to-Rail Output, Zero-Drift Operational Amplifier, 4 to 36 V, -40 to 105 degC, 8-pin SOIC (D8), Green (RoHS & no Sb/Br)", Current - Output / Channel=18mA, Current - Supply=415µA, Manufacturer="Texas Instruments", Operating Temperature="-40°C ~ 105°C", Package / Case="8-SOIC (0.154\", 3.90mm Width)", Supplier Device Package=8-SOIC, Supplier Part Number 1=296-29454-6-ND, Voltage - Supply, Single/Dual (±)="4 V ~ 36 V, ±2 V ~ 18 V", -3db Bandwidth=-, Amplifier Type=Zero-Drift, Category="Integrated Circuits (ICs)", ComponentLink1Description=http://www.ti.com/lit/ds/symlink/opa2188.pdf, ComponentLink1URL=http://www.ti.com/lit/ds/symlink/opa2188.pdf, Manufacturer Part Number=OPA2188AIDR, Mounting Type="Surface Mount", Number of Circuits=2, Output Type=Rail-to-Rail, Packaging=Digi-Reel®, Part Status=Active, Pricing 1="1=3.44, 10=3.089, 100=2.5307, 500=2.15434, 1000=1.81692 (USD)", RoHS="RoHS Compliant", Slew Rate="0.8 V/µs", Stock 1=8272, Supplier 1=Digi-Key
U6: Current - Supply=7.5mA, Manufacturer="Linear Technology", Operating Temperature="-40°C ~ 125°C (TA)", Package / Case="8-TSSOP, 8-MSOP (0.118\", 3.00mm Width)", Supplier Device Package=8-MSOP, Supplier Part Number 1=LTC6655BHMS8-5#PBF-ND, Temperature Coefficient=2ppm/°C, Tolerance=±0.025%, Voltage - Input="5.5 V ~ 13.2 V", Voltage - Output (Min/Fixed)=5V, Category="Integrated Circuits (ICs)", ComponentLink1Description=http://www.linear.com/docs/28576, ComponentLink1URL=http://www.linear.com/docs/28576, Manufacturer Part Number=LTC6655BHMS8-5#PBF, Mounting Type="Surface Mount", Noise - 0.1Hz to 10Hz=0.25ppmp-p, Noise - 10Hz to 10kHz=-, Output Type=Fixed, Packaging=Tube, Part Status=Active, Pricing 1="1=12.29, 25=8.158, 100=6.7 (USD)", Reference Type=Series, RoHS="RoHS Compliant", Stock 1=872, Supplier 1=Digi-Key
U8: "IC VREF SERIES 4.096V SOT23", Current - Supply=350µA, Manufacturer="Maxim Integrated", Operating Temperature="-40°C ~ 125°C (TA)", Package / Case=SOT-23-6, Supplier Part Number 1=MAX6070AAUT41+TCT-ND, Temperature Coefficient=6ppm/°C, Tolerance=±0.04%, Voltage - Input="4.3 V ~ 5.5 V", Voltage - Output (Min/Fixed)=4.096V, Category="Integrated Circuits (ICs)", ComponentLink1Description=https://datasheets.maximintegrated.com/en/ds/MAX6070-MAX6071.pdf, ComponentLink1URL=https://datasheets.maximintegrated.com/en/ds/MAX6070-MAX6071.pdf, Manufacturer Part Number=MAX6070AAUT41+T, Mounting Type="Surface Mount", Noise - 0.1Hz to 10Hz=9.6µVp-p, Noise - 10Hz to 10kHz=9µVrms, Output Type=Fixed, Packaging="Cut Tape (CT)", Part Status=Active, Pricing 1="1=3.41, 10=3.213, 25=2.5704, 50=2.4418, 100=2.2491, 250=2.13344, 500=2.05634 (USD)", Reference Type=Series, RoHS="RoHS Compliant", Stock 1=2623, Supplier 1=Digi-Key, Supplier Device Package=SOT-23-6
U10: library part CMP-0793-00109-1, "Low Capacitance, Low Charge Injection, +/-15 V / +12 V, 4:1 iCMOS Multiplexer, 120 Ohm Ron, 14-pin SOP (RU-14), Reel", Manufacturer="Analog Devices", Bandwidth (Hz)="800M, 550M", Code_JEDEC=MO-153AB-1, ComponentLink1Description="Manufacturer URL", ComponentLink1URL=http://www.analog.com/en/index.html, ComponentLink2Description=Datasheet, ComponentLink2URL=http://www.analog.com/static/imported-files/data_sheets/ADG1204.pdf, ComponentLink3Description="Package Specification", ComponentLink3URL=http://www.analog.com/static/imported-files/packages/36057385283879153717235186773RU14.pdf, DatasheetVersion="Rev. B", Max Analog Signal Range="Vss to Vdd", Mounting Technology="Surface Mount", PackageDescription="14-Pin Thin Shrink Small Outline Package, Body 5 x 4.4 mm, Pitch 0.65 mm", PackageReference=RU-14, PackageVersion=Aug-02, Packing=Reel, PartNumber=ADG1204YRUZ-REEL7, Ron (ohms)=120, t transition (s)=120n
U11: library part CMP-0249-00017-1, "16-Bit, +5V, 200ksps ADC with 10uA Shutdown, 10-Pin uMAX, -40°C to +85°C, Pb-Free, Tape and Reel", Code_JEDEC=MO-187-BA, ComponentLink1Description="Manufacturer URL", ComponentLink1URL=http://www.maxim-ic.com, ComponentLink2Description=Datasheet, ComponentLink2URL=http://datasheets.maxim-ic.com/en/ds/MAX11100.pdf, ComponentLink3Description="Package Specification", ComponentLink3URL=http://pdfserv.maxim-ic.com/package_dwgs/21-0061.PDF, DatasheetVersion="Rev 1, Jan-2012", PackageDescription="10-Pin Micro-MAX Thin Shrink Small Outline (uSOP), 3 x 3 x 0.85 mm Body, 0.5 mm Pitch, Pb-Free", PackageReference=U10+2, PackageVersion="revL, 2008"

## Free pads (board coordinates)
  round 196.85 hole 118.11: ""(0,0) ""(0,2350) ""(2350,0) ""(2350,2350)

## Via types
v1: diameter 39.37, hole 19.68, Top Layer to Bottom Layer, 17 vias
v2: diameter 50, hole 28, Top Layer to Bottom Layer, 9 vias

## Nets (pads, with @x,y where several pads share a name; then routed paths per layer and width w, separated by ;. In a path a pad name is that pad's centre, name@x,y a point inside that pad or via, vN(x,y) a via of type N, cw(c..) or ccw(c..) an arc to the next point about the centre after c; other vN are vias at no path point)
+3.3: C21.1 P7.6 U11.3 | length 105.8
  Top Layer w10: U11.3 980.01,710.95 1040.01,710.95 v1(1042.8,708.16) 1042.31,707.67 1042.31,667.31 C21.1
+5: C2.1 C15.2 C19.2 C20.1 C22.2 P5.4 P6.2 P7.4 R2.2 U1.5 U6.1 U6.2 U8.3 U8.4 U9.5 U10.2 U10.12 U11.7 U12.5 | length 1397.9
  Top Layer w10: U6.1 U6.2 C15.2 -11.24,2038.51 -15.64,2038.51 -27.14,2027.01 -27.14,1870 -20,1870 100,1750 P6.2 ; v1(246.02,1017.46) 251.64,1011.84 251.64,991.52 272.06,971.11 R2.2 ; v1(288.02,1174.46) 288.14,1174.34 328.83,1174.34 336.62,1166.55 U1.5 ; C2.1 335.7,1223.53 U1.5@335.7,1166.55 ; 537.71,662.29 537.71,604.83 v2(538.84,603.69) ; U8.4 626.59,663.99 674.57,663.99 v1(675.68,665.11) ; C22.2@717.02,1095.2 717.02,1094.44 722.26,1089.2 780.53,1089.2 U12.5 783.44,1092.94 783.44,1159.04 v1(783.02,1159.46) ; U11.7 820.56,730.8 862.69,730.8 892.21,760.32 v1@894.18,760.32 ; C19.2 993.27,1090.2 U9.5 v1(994.02,1149.46) ; v1@1086.11,862.69 1086.6,863.18 1138.77,863.18 U10.2 ; P5.4 1229.51,1968.85 1229.51,1870.49 v2(1230,1870) ; U10.12 1362.19,836.6 1433.06,836.6 v1(1433.55,836.11)
  Bottom Layer w10: v1(893.2,761.31) 893.69,760.82 893.69,726.37 C20.1
  other v1: 1085.13,863.67
+5R: U4.12 U4.17 U7.1 U7.4 | length 1470.5
  Top Layer w10: U7.1 346.72,2112.61 377.24,2112.61 444.24,2045.6 U7.4 457.37,2043.3 523.7,2043.3 v2(526,2041) ; U4.17 671.54,1437.84 653.75,1420.05 653.75,1327.69 671.54,1309.89 712.88,1309.89 730.68,1292.09 730.68,1263.11 v1(702.02,1234.46)
  Bottom Layer w10: v2(526,2041) 526,1774.22 788.61,1511.6 788.61,1321.05 v1(702.02,1234.46)
+9: C9.2 P6.6 U4.16 | length 759.8
  Top Layer w10: U4.16 692.31,1412.35 757.92,1412.35 v1(758.02,1412.46)
  Bottom Layer w10: P6.6 120,1500 170,1450 539.01,1450 572.12,1416.89 C9.2 ; C9.2@576.55,1412.46 v1(758.02,1412.46)
+12: C13.2 C14.2 P6.1 U5.8 U7.5 | length 4130.7
  Top Layer w10: C14.2 454.75,2120.72 456.27,2119.2 531.8,2119.2 v2(533,2118) ; U5.8 1390.68,1249.46 v2(1444.02,1249.46)
  Bottom Layer w10: v2(533,2118) 468,2118 140,1790 90,1790 P6.1 -70,1630 -70,710 72.21,567.79 1208.49,567.79 1464.14,823.44 1464.14,1020.98 1444.02,1041.1 v2(1444.02,1249.46) 1443.52,1248.96 1385.19,1248.96 1379.46,1243.22 C13.2@1379.46,1239.46
-5: C4.1 C10.1 P5.3 P6.3 U1.2 U4.5 | length 3048.3
  Top Layer w10: C4.1 376.52,977.7 376.52,1054.71 387.72,1065.91 387.72,1068.4 408.78,1089.46 v1(489.02,1089.46) ; U4.5 487.53,1412.25 498.19,1401.59 502.54,1401.59 537.06,1367.06 613.43,1443.43 613.43,1913.43 970,2270 1150,2270 1229.02,2190.98 P5.3 ; 508.39,1395.73 508.39,1281.02 489.02,1261.65 v1(489.02,1089.46) ; C10.1 555.46,1089.46 v1(489.02,1089.46)
  Bottom Layer w10: P6.3 -50,1550 -50,1324.58 69.3,1205.28 373.2,1205.28 v1(489.02,1089.46)
A0: P7.5 U10.1 | length 1323.1
  Top Layer w10: U10.1 1156.98,888.28 1545.25,500 P7.5 P7.5@2301.57,500
A1: P7.3 U10.14 | length 1032.3
  Top Layer w10: U10.14 2011.72,888.28 P7.3@2282,618
"ADC REF": C18.2 U8.5 U8.6 U11.6 | length 321.7
  Top Layer w10: 645.98,699.69 717.49,699.69 753.04,735.24 753.04,739.26 764.22,750.44 820.44,750.44 U11.6 ; 645.98,737.09 695.81,737.09 709.19,750.48 C18.2
Analog_Mux_Out: U10.6 U11.5 | length 163.4
  Top Layer w10: U11.5 1110.6,750.4 1120.52,760.32 U10.6
BEAM: P5.1 U4.4 | length 1525.7
  Top Layer w10: U4.4 567.84,1437.84 597.53,1467.53 597.53,1927.53 960,2290 1158.95,2290 1279.02,2169.93 P5.1
"Beam Sync Demod Out": C5.2 P2.2 R2.1 R4.2 | length 444.6
  Top Layer w10: C5.2 226.07,925.76 271.98,925.76 R2.1 R4.2 414.89,846.94 430,846.94 ; P2.2 415,831.94 430,846.94 ; 589.06,846.94 430,846.94
Beam_Out: P1.2 R3.1 U4.3 | length 316.2
  Top Layer w10: R3.1@375.68,1464.46 375.98,1464.16 465.11,1464.16 U4.3 513.43,1463.43 513.43,1636.57 P1.2
Beam_Reduced: U10.5 | length 500.4
  Top Layer w10: 679.61,884.34 826.66,884.34 925.09,785.91 U10.5
FB_CS0: P7.10 U11.9 | length 1936.5
  Top Layer w10: U11.9 820.4,691.27 794.08,691.27 781.03,678.22 781.03,665.11 1246.14,200 2300,200 P7.10@2418,318
GND: C2.2 C4.2 C5.1 C7.1 C8.2 C9.1 C10.2 C13.1 C14.1 C15.1 C16.1 C17.2 C18.1 C19.1 C20.2 C21.2 C22.1 P1.1 P2.1 P3.1 P4.2 P5.2 P5.9 P6.5 P7.1 R7.1 R8.2 R14.2 R19.1 R20.1 U3.4 U4.2 U4.6 U4.14 U4.19 U5.4 U6.3 U6.4 U6.5 U6.8 U7.2 U8.2 U9.2 U10.3 U10.13 U11.2 U11.4 U11.8 U12.2 | length 231.7
  Top Layer w10: U11.8 885.83,711.03 887.72,709.14 929.61,709.14 ; U11.2 U11.2 947.02,691.43 929.61,708.83 929.61,709.14 ; U11.4 979.85,730.64 943.14,730.64 929.61,717.11 929.61,709.14
  other v2: 1003,1399
NetC1_1: C1.1 R1.1 R3.2 U1.4 | length 514.5
  Top Layer w10: R1.1 206.98,1118.16 261.07,1118.16 C1.1 379.93,1115.2 411.43,1146.7 411.43,1168.35 374.02,1205.76 R3.2
NetC1_2: C1.2 R1.2 R4.1 U1.1 | length 229.2
  Top Layer w10: R1.2 206.98,1080.76 261.07,1080.76 C1.2 305.13,1083.71 335.32,1053.51 335.32,972.41 R4.1
NetC6_1: C6.1 U3.7 | length 70.8
  Bottom Layer w10: U3.7 1462.04,1922.47 1478.79,1922.47 C6.1
NetC6_2: C6.2 U3.6 | length 67.5
  Bottom Layer w10: U3.6 1441.96,1989.46 1466.98,1964.44 1478.79,1964.44 C6.2
NetC11_1: C11.1 R12.2 R13.2 R20.2 | length 223.8
  Top Layer w10: C11.1 945.52,1469.46 R12.2 R13.2 ; C11.1@944.02,1467.96 R20.2
NetC11_2: C11.2 R10.1 R11.2 | length 106.9
  Top Layer w10: R11.2 R10.1 C11.2
NetC12_1: C12.1 R16.2 R18.2 R19.2 | length 223.7
  Top Layer w10: C12.1 944.02,1332.96 R19.2 945.7,1277.78 1055.7,1277.78 R18.2 R16.2
NetC12_2: C12.2 R15.1 R17.2 | length 111.9
  Top Layer w10: R15.1 R17.2 C12.2
NetC16_2: C16.2 U6.6 U6.7 U7.3 | length 353.3
  Top Layer w10: U6.6 302.79,2018.2 320.31,2035.73 320.31,2037.8 U7.3@326.3,2043.8 ; U6.7 224.59,2044.7 U7.3@336.22,2044.7 ; U7.3 338.93,1971.39 357.55,1952.77 C16.2@383,1952.77
NetC17_1: C17.1 U8.1 | length 56.6
  Top Layer w10: 537.71,737.09 552.09,751.48 C17.1
NetP3_2: P3.2 R8.1 U3.3 | length 1045.4
  Top Layer w10: P3.2 1700,2927.56 1672.44,2900 1672.44,2303.94 R8.1 1673.23,2045.25 U3.3
NetR7_2: R7.2 U1.3 | length 75.5
  Top Layer w10: U1.3 417.72,1035.09 417.72,977.41 R7.2
NetR10_2: R10.2 U4.18 | length 85.6
  Top Layer w10: U4.18 692.72,1463.94 776.86,1463.94 R10.2
NetR11_1: R11.1 R14.1 | length 2013.5
  Top Layer w10: v1(774.02,1569.46) 775.7,1567.78 775.7,1516.13 R11.1
  Bottom Layer w10: v1(774.02,1569.46) 774.02,3504.02 R14.1
NetR12_1: R12.1 R16.1 U5.5 | length 516.2
  Top Layer w10: v1(1099.35,1377) 1100.02,1377.66 1100.02,1468.8 R12.1 ; R16.1 1102.72,1231.5 1233.2,1231.5 1239.02,1237.33 U5.5 ; v1(1239.76,1377.76) 1239.39,1377.39 1239.39,1251.72 U5.5@1240,1251.11
  Bottom Layer w10: v1(1099.35,1377) 1099.73,1377.38 1239.38,1377.38 v1(1239.76,1377.76)
NetR13_1: R13.1 R18.1 U5.3 | length 484
  Top Layer w10: R18.1 1100.68,1281.43 1154,1334.75 1154,1519.46 ; R13.1 1154,1519.46 ; U5.3 1289.02,1471.58 1241.15,1519.46 1154,1519.46
NetR14_3: R14.3 R15.2 | length 2439.7
  Top Layer w10: v1(776,1227) 776.68,1227.68 776.68,1283.77 R15.2
  Bottom Layer w10: v1(776,1227) 899.62,1350.62 899.62,3429.62 R14.3
NetR17_1: R17.1 U4.13 | length 85.6
  Top Layer w10: U4.13 692.72,1334.97 776.86,1334.97 R17.1
NetR22_3: U9.3 | length 1023
  Top Layer w10: U9.3 1068.83,983.73 1076.62,991.52 1259.36,991.52 1625.56,1357.72 1625.56,1644.26 1633.35,1652.06 1638.28,1652.06
NetR23_3: U12.3 | length 1141.8
  Top Layer w10: U12.3 858.66,987.21 911.88,1040.44 911.88,1110.58 981.35,1180.05 1425.39,1180.05 1479.93,1234.58 1479.93,1403.97 1464.02,1419.87 1464.02,1594.18
PLATE_N: P5.6 U5.1 U5.2 | length 1121.2
  Top Layer w10: U5.2 U5.1
  Top Layer w15: P5.6 1179.02,1794.36 1080,1695.33 1080,1618.68 1354.7,1618.68 1413.26,1560.12 1413.26,1419.98 1360.24,1366.96 1347.81,1366.96 1339.02,1375.74 U5.2
PLATE_P: P5.5 U5.6 U5.7 | length 1130.5
  Top Layer w10: U5.6 U5.7
  Top Layer w15: P5.5 1179.02,2089.22 1218.76,2049.48 1287.33,2049.48 1320,2016.81 1320,1688.73 1438.26,1570.48 1438.26,1409.62 1370.59,1341.96 1347.81,1341.96 1339.02,1333.17 U5.7
PWM: P5.10 P7.2 | length 1946
  Top Layer w10: P5.10 1079.02,1928.98 1070.18,1920.14 1078.79,1920.14 1079.51,1919.42 1079.51,1890.49 v2(1080,1890)
  Bottom Layer w10: v2(1080,1890) 1080,1820 1538.16,1361.84 1738.16,1361.84 P7.2
PWM2: P6.4 U4.1 U4.11 U4.20 | length 1346.6
  Top Layer w10: P6.4 150,1600 200,1550 409.78,1550 445.17,1514.61 U4.1 ; v1(644.02,1559.46) v1@644.02,1551.51 ; U4.11 671.54,1284.3 637.84,1318 637.84,1545.33 v1@644.02,1551.51 ; U4.20 672.57,1514.61 663.79,1523.39 663.79,1531.75 v1@644.02,1551.51
  Bottom Layer w10: P6.4 154.73,1600 200,1554.73 639.3,1554.73 v1(644.02,1559.46)
SPI0_MISO: P7.7 U11.1 | length 1449.5
  Top Layer w10: U11.1 998.47,671.66 998.55,671.58 998.55,642.7 1241.25,400 P7.7
SPI0_SCLK: P7.9 U11.10 | length 1635
  Top Layer w10: U11.10 843.94,671.66 1215.61,300 P7.9@2301.57,300
ZH: C8.1 P4.1 P5.8 P7.8 U3.8 | length 4243.1
  Top Layer w10: P5.8 1129.51,1968.85 1129.51,1850.49 v2(1130,1850) ; 1426.62,1684.73 1427.82,1685.93 1427.82,1788.26 U3.8
  Bottom Layer w10: v2(1130,1850) 1130,1848.48 1189.02,1789.46 U3.8 C8.1@1429.02,1684.89 ; C8.1 1433.59,1668.55 1724.4,1377.74 1764.75,1377.74 1912.49,1230 1947.18,1230 ; P4.1 2106.3,1389.12 1947.18,1230 ; P7.8 2440.43,440.43 2440.43,736.75 1947.18,1230
ZH_Reduced: U10.4 U12.1 U12.4 | length 590.9
  Top Layer w10: U12.4 858.66,1081.7 791.65,1014.69 791.65,984.18 U12.1 783.85,942.15 812,914 925.47,914 1027.97,811.5 U10.4
ZP: C7.2 P4.3 P5.7 U3.1 | length 2602.9
  Top Layer w10: P5.7 1129.51,2130.06 1129.51,2219.51 v2(1130,2220) ; U3.1 1729.02,1689.65 1728.83,1689.46 1733.75,1689.46 2018.85,1974.56 2018.85,2712.55 P4.3
  Bottom Layer w10: v2(1130,2220) 1130,2080 1380.11,1829.89 1445.77,1829.89 1484.95,1790.71 1727.77,1790.71 U3.1
ZP_Reduced: U9.1 U9.4 U10.11 | length 590.3
  Top Layer w10: U9.4 1068.83,1080.14 1001.82,1013.13 1001.82,982.62 U9.1 994.02,963.99 1007.72,950.29 1007.72,947.81 1049.46,906.07 1249.42,906.07 1343.98,811.5 U10.11
pads on no net: U3.2 U3.5 U4.7 U4.8 U4.9 U4.10 U4.15 U10.7 U10.8 U10.9 U10.10

## Polygon pours and split planes (outlines as drawn)
GND on Bottom Layer "Bottom_GND" (solid, shelved, pour order 2): -150,3702 -150,-150 2487.68,-150 2487.68,3702
GND on Top Layer "Top_GND" (solid, shelved, pour order 0): -150,3702 -150,-150 2487.68,-150 2487.68,3702
+3.3 on +3.3 (split plane): 2467.59,3681.9 2467.59,-130.01 -130.01,-130.01 -130.01,3681.9
+5 on +5 (split plane): 2467.59,3681.9 2467.59,-130.01 -130.01,-130.01 -130.01,3681.9

## Silkscreen, mask and mechanical layers (free items; w line width, h text height)
Top Overlay:
  circle w3.94: c279.51,460.22 r183.58
  circle w10: c279.51,460.22 r196.85
  rectangle: 1425,2400 1780,2750
  lines w5: 219.51,553.22 249.51,523.22 279.51,543.22 239.51,493.22 299.51,523.22 259.51,473.22 319.51,503.22 279.51,453.22 339.51,483.22 299.51,433.22 359.51,463.22 339.51,433.22 369.51,403.22
  lines w10: 199.51,558.22 239.51,558.22 ; 219.51,553.22 219.51,403.22 369.51,403.22 ; 374.51,383.22 374.51,423.22
  text "Offset / Adjust" at 710,3180 h20
  text "ZH" at 2090,2900 h19.68
  text "GND" at 2180,2900 h19.68
  text "ZP" at 2290,2900 h19.68
  text "ZLS" at 239.51,340.22 h47.24
  text "LM-002" at 213.99,96.51 h39.37
  text "REV A" at 213.99,21.51 h39.37
  text "ZLS Corp" at 213.99,-53.49 h39.37
Bottom Overlay:
  text "Beam Out" at 540,1530 h20
  text "Synch Demod Out" at 510,670 h20
Mechanical 1:
  text "Top faces inward to center of meter" at -70,3560 h20

## Dimensions
2487.69,-150.11 to -150.11,-150.11 on Mechanical 1
-150.11,-150.11 to -150.11,3702 on Mechanical 1
2350,2350 to 2350,0 on Mechanical 1
2350,0 to 0,0 on Mechanical 1
0,0 to -150,-150 on Mechanical 1
-150.11,-150.11 to 0,0 on Mechanical 1
2400,300 to 2350,0 on Mechanical 1
0,0 to 0,1500 on Mechanical 1